# Altium PCB DAP Board V0.3 single.PcbDoc
Units mil, origin at the board's own origin, x right, y up, seen from the top; angles counter-clockwise.
Board outline 330 x 290 mil, 2 copper layers (Top Layer, Bottom Layer); 1 components, 14 nets, 10 pads, 32 vias.
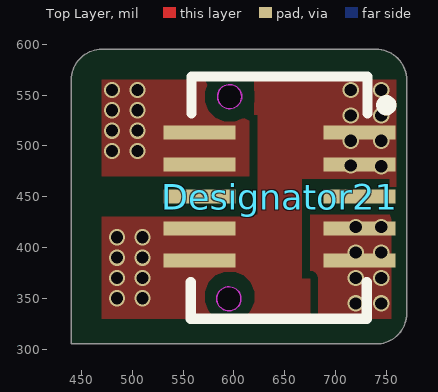
[diagram p0: Top Layer view]
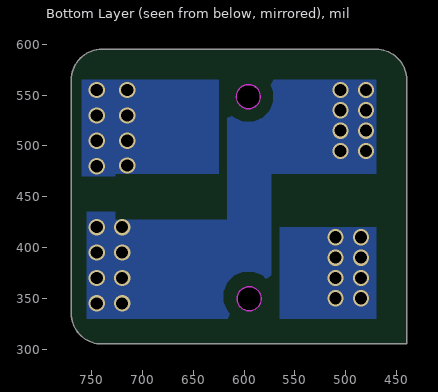
[diagram p1: Bottom Layer view, seen from below]

## Layer stack, top to bottom
Top Solder: solder mask 0.4, Solder Resist, Dk 3.5
Top Layer: signal copper 1.4
Dielectric 1: dielectric 12.6, FR-4, Dk 4.8
Bottom Layer: signal copper 1.4
Bottom Solder: solder mask 0.4, Solder Resist, Dk 3.5

## Board outline
440,305 440,565 cw(c470,565) 470,595 740,595 cw(c740,565) 770,565 770,335 cw(c740,335) 740,305

## Design rules (kind name [scope] priority, off if disabled: settings)
Clearance [All] p1: gap=8 ignorepadtopadclearanceinfootprint=FALSE except(0: Arc-Hole Track-Hole SMDPad-Hole THPad-Hole Via-Hole Fill-Hole Poly-Hole Region-Hole Text-Hole)
PolygonConnect [All] p1: connectstyle=Relief reliefconductorwidth=10 reliefentries=4 polygonreliefangle="90 Angle" airgapwidth=10
RoutingVias [All] p1: holewidth=28 width=50 viastyle="Through Hole" minholewidth=28 minwidth=50 maxholewidth=28 maxwidth=50
SolderMaskExpansion [All] p1: expansion=4 istentingtop=FALSE
Width [All] p1: maxlimit=8 minlimit=8 preferedwidth=8
30 further rules are at their usual default settings.

## Components (designator, comment, footprint, x,y, rotation, side; value= is the part's Value field where it differs from the comment)
Designator21 "Comment" BTB-0.8mm-SMD-M-2*5PIN 645,450 r270 top

## Footprints (in the part's own frame and the unit in brackets; to place one, negate y for a bottom-side part, rotate by r counter-clockwise, add the part's x,y. Pads: shape width x height; smd on the part's side, far side on the other; paste and mask are expansions set on the pad)
BTB-0.8mm-SMD-M-2*5PIN [mm] "0.8双槽插板对板母座，10PIN"
  rect 0.35x1.8 smd: 1(-1.6,2) 2(-1.6,-2) 3(-0.8,2) 4(-0.8,-2) 5(0,2) 6(0,-2) 7(0.8,2) 8(0.8,-2) 9(1.6,2) 10(1.6,-2)
  Keep-Out Layer board cut-out: 2.853,-1.27 2.853,-1.33 2.807,-1.44 2.723,-1.524 2.613,-1.57 2.493,-1.57 2.383,-1.524 2.299,-1.44 2.253,-1.33 2.253,-1.27 2.253,-1.21 2.299,-1.1 2.383,-1.016 2.493,-0.97 2.613,-0.97 2.723,-1.016 2.807,-1.1 2.853,-1.21 2.853,-1.27 2.853,-1.27
  Keep-Out Layer board cut-out: -2.2,-1.25 -2.2,-1.31 -2.246,-1.42 -2.33,-1.504 -2.44,-1.55 -2.56,-1.55 -2.67,-1.504 -2.754,-1.42 -2.8,-1.31 -2.8,-1.25 -2.8,-1.19 -2.754,-1.08 -2.67,-0.996 -2.56,-0.95 -2.44,-0.95 -2.33,-0.996 -2.246,-1.08 -2.2,-1.19 -2.2,-1.25 -2.2,-1.25
  Keep-Out Layer circle w0.025: c2.553,-1.27 r0.3
  Keep-Out Layer circle w0.025: c-2.5,-1.25 r0.3
  Keep-Out Layer region: 2.853,-1.27 2.853,-1.33 2.807,-1.44 2.723,-1.524 2.613,-1.57 2.493,-1.57 2.383,-1.524 2.299,-1.44 2.253,-1.33 2.253,-1.27 2.253,-1.21 2.299,-1.1 2.383,-1.016 2.493,-0.97 2.613,-0.97 2.723,-1.016 2.807,-1.1 2.853,-1.21 2.853,-1.27 2.853,-1.27
  Keep-Out Layer region: -2.2,-1.25 -2.2,-1.31 -2.246,-1.42 -2.33,-1.504 -2.44,-1.55 -2.56,-1.55 -2.67,-1.504 -2.754,-1.42 -2.8,-1.31 -2.8,-1.25 -2.8,-1.19 -2.754,-1.08 -2.67,-0.996 -2.56,-0.95 -2.44,-0.95 -2.33,-0.996 -2.246,-1.08 -2.2,-1.19 -2.2,-1.25 -2.2,-1.25
  silkscreen extent -3,-2.22 3.05,2.79, body extent -2.95,-2.67 2.95,2.53, height 3.94

## Via types
v1: diameter 16, hole 12, Top Layer to Bottom Layer, tented both sides, 32 vias

## Nets (pads, with @x,y where several pads share a name; then routed paths per layer and width w, separated by ;. In a path a pad name is that pad's centre, name@x,y a point inside that pad or via, vN(x,y) a via of type N, cw(c..) or ccw(c..) an arc to the next point about the centre after c; other vN are vias at no path point)
GND: 
  other v1: 485,350 510,350 485,370 510,370 485,390 510,390 485,410 510,410 745,480 715,480.57 715,505 745,505 715,530 745,530 715,555 745,555
NetJP0000_1: 
NetJP0000_2: 
NetJP0000_3: 
NetJP0000_4: 
NetJP00_5: 
NetJP000_5: 
NetJP0000_5: 
NetJP0000_6: 
NetJP0000_7: 
NetJP0000_8: 
NetJP0000_9: 
NetJP0000_10: 
VBAT: 
  other v1: 720,345 745,345 720,370 745,370 720,395 745,395 720,420 745,420 480,495 505,495 480,515 505,515 480,535 505,535 480,555 505,555
pads on no net: Designator21.1 Designator21.2 Designator21.3 Designator21.4 Designator21.5 Designator21.6 Designator21.7 Designator21.8 Designator21.9 Designator21.10

## Polygon pours and split planes (outlines as drawn)
VBAT on Bottom Layer "VBAT_L02_P007" (solid, pour order 7): 470,565 470,470 565,470 565,330 755,330 755,435 625,435 625,565
GND on Bottom Layer "GND_L02_P009" (solid, pour order 9): 625,565 625,470 760,470 760,565
GND on Bottom Layer "GND_L02_P008" (solid, pour order 8): 470,420 470,330 565,330 565,420
VBAT on Top Layer "VBAT_L01_P012" (solid, pour order 12): 615,470 470,470 470,565 615,565
GND on Top Layer "GND_L01_P010" (solid, pour order 10): 470,330 675,330 675,460 760,460 760,565 620,565 620,430 470,430
VBAT on Top Layer "VBAT_L01_P011" (solid, pour order 11): 675,435 675,330 755,330 755,435

## Silkscreen, mask and mechanical layers (free items; w line width, h text height)
Mechanical 1:
  lines w5: 440,510 440,305 740,305
  lines w10: 440,510 440,565 cw(c470,565) 470,595 740,595 cw(c740,565) 770,565 770,335 cw(c740,335) 740,305